# Altium PCB Copy of SixPak Ultra.PcbDoc (part 2 of 2)
Units mm, origin at the board's own origin, x right, y up, seen from the top; angles counter-clockwise.
Board outline 332.63 x 105.91 mm, 4 copper layers (Top Copper, Signal Layer 1, Signal Layer 2, Bottom Copper), stack 1.17 mm thick; 206 components, 300 nets, 1466 pads, 0 vias.
Unrouted connection lines stored in the file: 997.
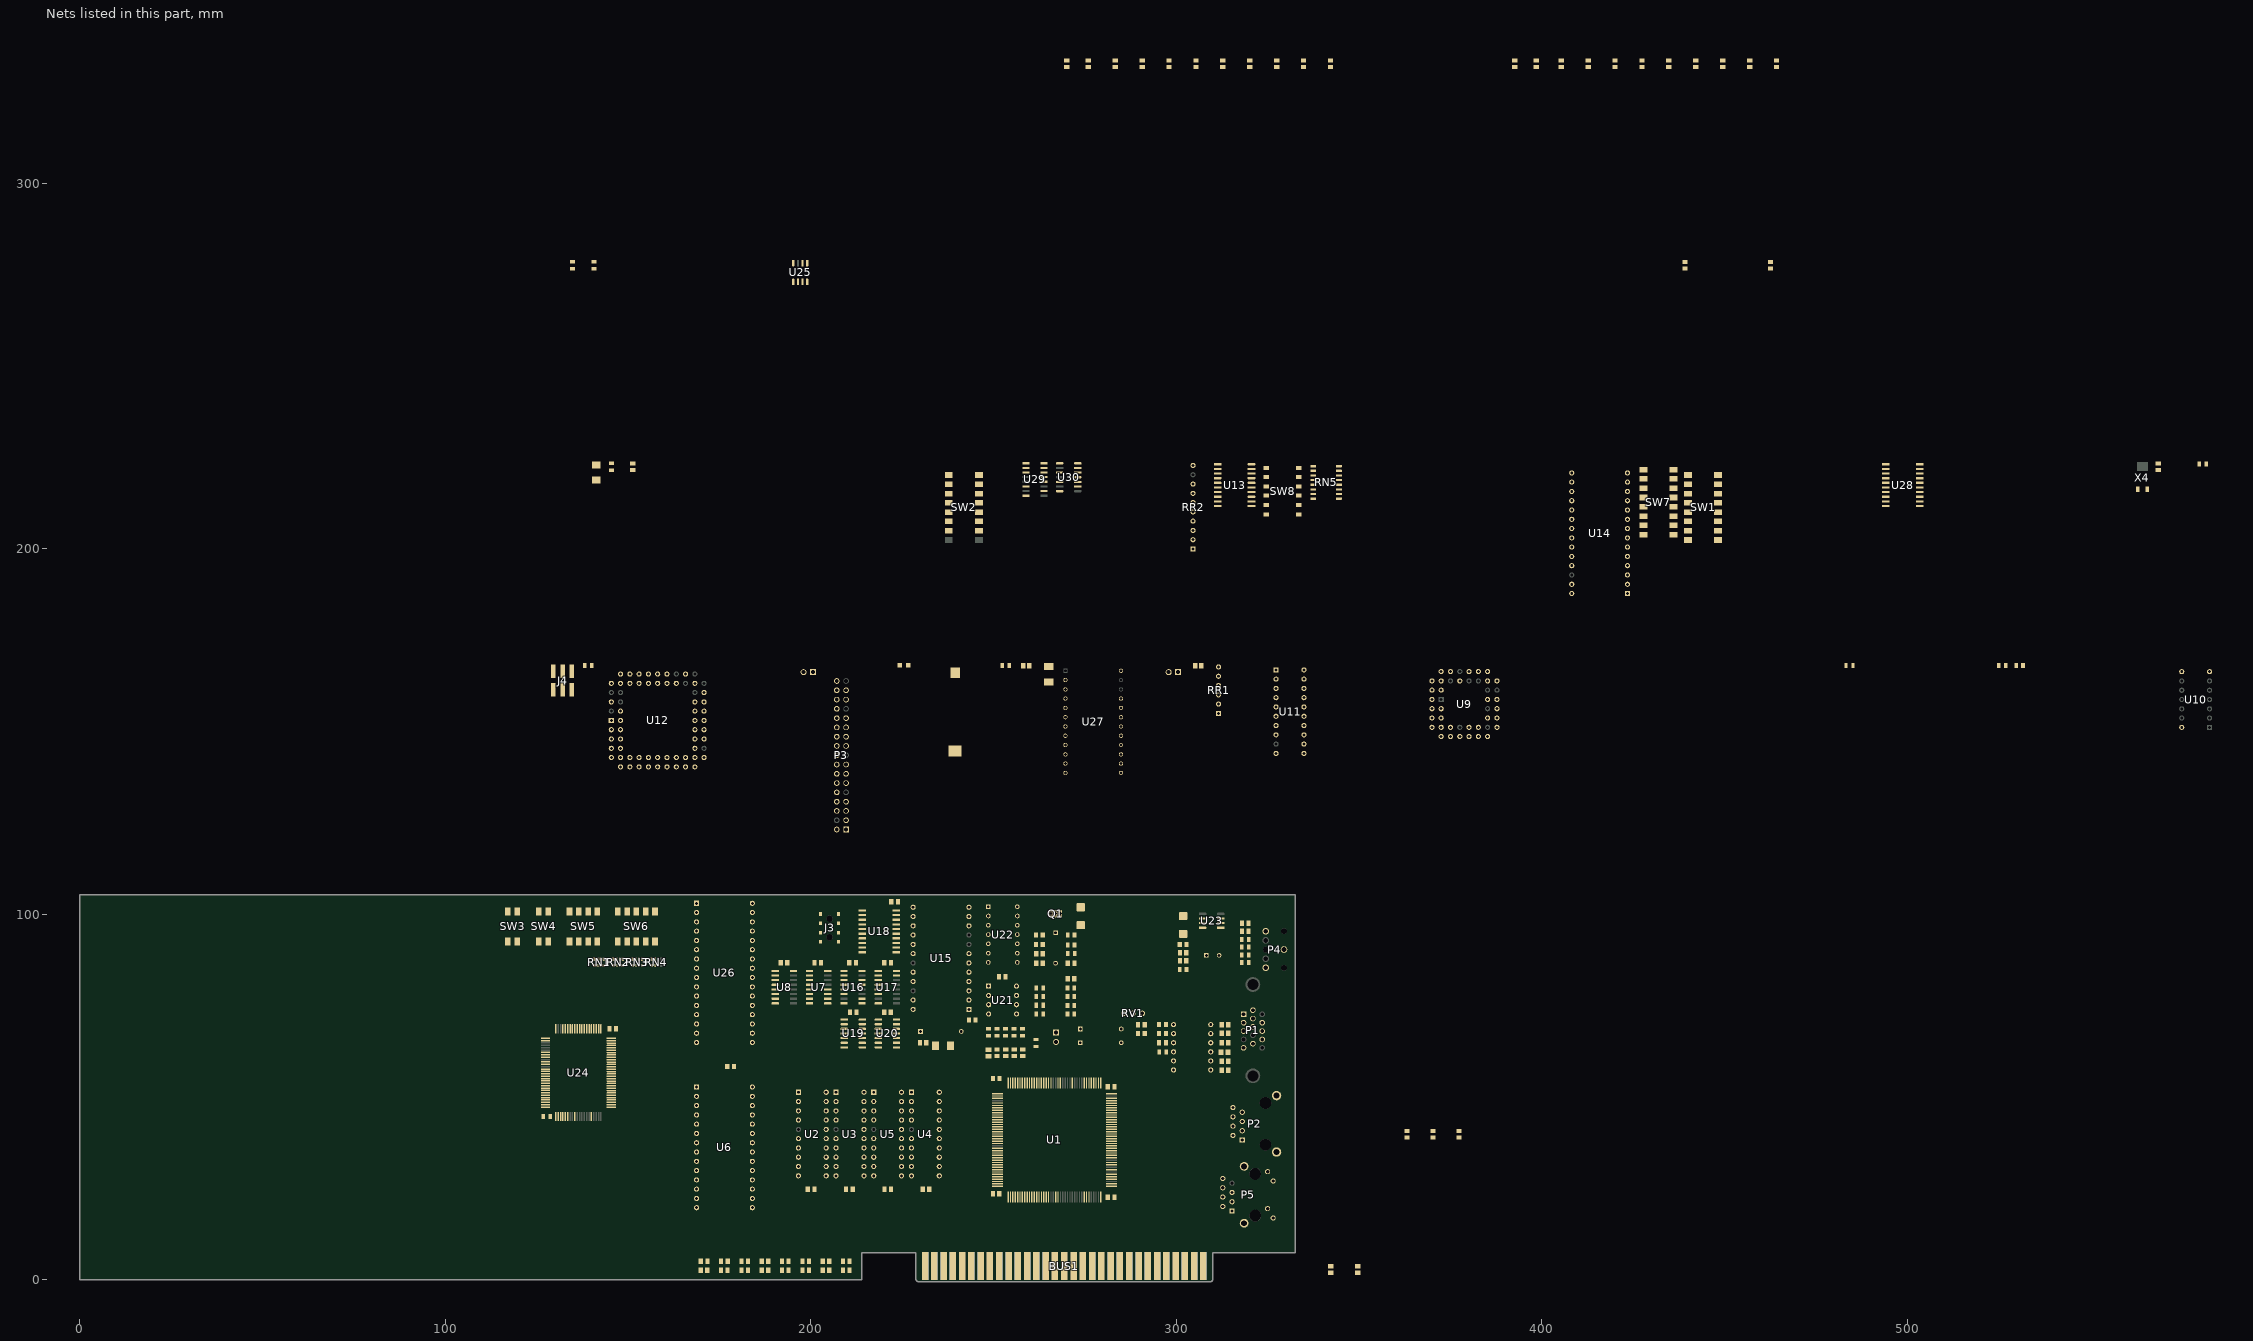
[diagram p2: the nets of this part, all layers, seen from the top]

## Part data
BT1: "Battery Holder (Open) Coin, 20.0mm 1 Cell SMD (SMT) Tab", Package=None, Availability=Unavailable, MF="{'manufacturer': u'Harwin Inc.'}", MP=S8421-45R, Price=None
C1 C2 C3 C4 C5 C6 C7 C8 C12 C14 C40 C48 C50 CD1 CD2 CD3 CD4 CD5 CD6 CD7 CD8 CD9 CD10 CD11 CD12 CD13 CD14 CD15 CD16 CD17 CD18 CD19 CD20 CD21 CD22 CD23 CD24 CD25 CD27 CD28 CD29 CD30 CD31 CD32 CD33 CD34 CD35 CD36 CD37 CD38 CD39 CD40 CD41: library part TAJR104K035RNJ, "0.1ÂµF Molded Tantalum Capacitors 35V 0805 _2012 Metric_ 29Ohm", Package="0805 AVX", Availability=Unavailable, MF=AVX, MP=TAJR104K035RNJ, Price=None, SnapEDA_Link=https://www.snapeda.com/parts/TAJR104K035RNJ/AVX%20/%20Kyocera/view-part/1689905/?ref=snap
C9 C10 C11 C13 C31 C49 C51 C52 C53 CD42 CD43 CD44: library part TACR106K016XTA, "Cap Tant Solid 10uF 16V R CASE 10% (2 X 1.35 X 1.35mm) SMD 2012-15 5 Ohm 125ÂÂŽ T/R", Package=None, Availability=Unavailable, MP=TACR106K016XTA, Price=None
C15 C16: library part CGA4J2X8R1H104K125AA, "0.1 ÂµF Â±10% 50V Ceramic Capacitor X8R 0805 (2012 Metric)", Package="2012 TDK", Check_prices=https://www.snapeda.com/parts/CGA4J2X8R1H104K125AA/TDK/view-part/?ref=eda, Digi-Key_Part_Number=445-5909-2-ND, MF=TDK, MP=CGA4J2X8R1H104K125AA, Purchase-URL=https://pricing.snapeda.com/search/part/CGA4J2X8R1H104K125AA/?ref=eda, SnapEDA_Link=https://www.snapeda.com/parts/CGA4J2X8R1H104K125AA/TDK/view-part/?ref=snap
C17: library part C0805C101J5RAC7800, Package=None, Availability=Unavailable, MP=C0805C101J5RAC7800, Price=None
C18 C19 C20 C21 C22 C23 C24 C26 C27: library part 08055A470JAT2A, "Capacitor: ceramic; 47pF; 50V; C0G; Â±5%; SMD; Case (inch):0805", Package=None, Availability=Unavailable, MP=08055A470JAT2A, Price=None
C25: library part CC0805KFX7R8BB105, "1ÂµF Â±10% 25V Ceramic Capacitor X7R 0805 (2012 Metric)", Package="0805 Yageo", Arrow_Electronics-Purchase-URL=https://snapeda.com/shop?store=Arrow+Electronics&id=1817011, Availability=Good, BuyPart=https://www.snapeda.com/parts/CC0805KFX7R8BB105/Yageo/view-part/1817011/?ref=eda, MF=Yageo, Mouser-Purchase-URL=https://snapeda.com/shop?store=Mouser&id=1817011, MP=CC0805KFX7R8BB105, Price=None, SnapEDA_Link=https://www.snapeda.com/parts/CC0805KFX7R8BB105/Yageo/view-part/1817011/?ref=snap
C28 C29: library part CMP-2007-01412-1, Manufacturer=Vitramon, Part Number=VJ0805A220KXJPW1BC
C30 C32 C33 C34 C35: library part C0805C472J2GAC7800, Package=None, Availability=Unavailable, MP=C0805C472J2GAC7800, Price=None
C36: library part TACR475M020XTA, "4.7uF SMD Solid MnO2 Tantalum Electrolytic Capacitor, 20 V dc +/-20%, TAC Series", Package=None, Availability=Unavailable, MP=TACR475M020XTA, Price=None
C37 C41: library part TAJC106J016RNJ, "10ÂµF Molded Tantalum Capacitors 16V 2312 (6032 Metric) 2Ohm", Package="2312 AVX", Availability=Bad, Check_prices=https://www.snapeda.com/parts/TAJC106J016RNJ/AVX/view-part/1684768/?ref=eda, MF=AVX, MP=TAJC106J016RNJ, Price=None, Purchase-URL=https://pricing.snapeda.com/search/part/TAJC106J016RNJ/?ref=eda, SnapEDA_Link=https://www.snapeda.com/parts/TAJC106J016RNJ/AVX/view-part/1684768/?ref=snap
C38: library part 0805YC102JAT2A, "CAP CER 1000PF 16V 5% X7R 0805", Package=None, Availability=Unavailable, MP=0805YC102JAT2A, Price=None
C39: library part C0805C271F5GACTU, "CAP, MLCC, C0G, 270PF, 50V, 0805", Package=None, Availability=Unavailable, MP=C0805C271F5GACTU, Price=None
C42: library part CGA4C2C0G1H472J060AA, "4700 pF Â±5% 50V Ceramic Capacitor C0G, NP0 0805 (2012 Metric)", Package="2012 TDK", Availability="In Stock", Check_prices=https://www.snapeda.com/parts/CGA4C2C0G1H472J060AA/TDK/view-part/?ref=eda, MF=TDK, MP=CGA4C2C0G1H472J060AA, Price=None, Purchase-URL=https://pricing.snapeda.com/search/part/CGA4C2C0G1H472J060AA/?ref=eda, SnapEDA_Link=https://www.snapeda.com/parts/CGA4C2C0G1H472J060AA/TDK/view-part/?ref=snap
C43: library part ECA1CM471, "470F 16V Aluminum Electrolytic Capacitors Radial, Can 2000 Hrs @ 85C", Package="RADIAL-2 Panasonic", Availability="No availability data", Check_prices=https://www.snapeda.com/parts/ECA1CM471/Panasonic/view-part/5788233/?ref=eda, MF=Panasonic, MP=ECA1CM471, Price=None, SnapEDA_Link=https://www.snapeda.com/parts/ECA1CM471/Panasonic/view-part/5788233/?ref=snap
C44 C45: library part C0805C100K4HACAUTO, Package=None, Availability=Unavailable, MP=C0805C100K4HACAUTO, Price=None
C46 C47: library part C0805C103J4RAC7800, Package=None, Availability=Unavailable, MP=C0805C103J4RAC7800, Price=None
D1: "Small Signal Fast Switching Diodes", Package=None, Availability=Unavailable, MP=1N4148, Price=None
J1 J2 J5: "Header, Friction Lock; MTA-100; 2; 250 VAC; Polyester; Tin; Copper Alloy; Tin", Package=None, Centerline_Pitch="2.54 mm[.1 in]", Digi-Key_Part_Number=A1911-ND, Digi-Key_Purchase_URL=https://www.digikey.com/product-detail/en/te-connectivity-amp-connectors/640452-2/A1911-ND/108973?utm_source=snapeda&utm_medium=aggregator&utm_campaign=symbol, MF="TE Connectivity", MP=640452-2, Number_of_Positions=2, Product_Type=Connector, SnapEDA_Link=https://www.snapeda.com/parts/640452-2/TE%20Connectivity%20AMP%20Connectors/view-part/2877927/?ref=snap, TE_purchase_URL=https://www.te.com/usa-en/product-640452-2.html?te_bu=Cor&te_type=disp&te_campaign=seda_glo_cor-seda-global-disp-prtnr-fy19-seda-model-bom-cta_sma-317_1&elqCampaignId=32493
J3: library part SAMTEC-TSM-104-01-X-DV-AJ, Package=SAMTEC-TSM-104-01-X-DV-A, DeviceName=J, DeviceSetName=SAMTEC-TSM-104-01-X-DV-A, GateName_1=A, LibraryName=SAMTEC-TSM-104-01-X-DV-A, SymbolName_1=SAMTEC-TSM-104-01-X-DV-AA
J4: library part TSM-103-01-T-DV, Package=None, Availability=Unavailable, MF=Samtec, MP=TSM-103-01-T-DV, Price=None
L1 L2 L3: library part 78F5R6J-RC, "No Description Available", Mfr_Name="Bourns Electronics", Copyright="Copyright (C) 2022 Ultra Librarian. All rights reserved.", Digi-Key_Part_Number_1=78F5R6J-RC-ND, Manufacturer_Part_Number=78F5R6J-RC, RefDes=RefDes, Type=DEV
P1: library part DE15
P2: "Conn Mod Jack 8p8c r/a Shielded", Package=None, Availability=Unavailable, MF="{'manufacturer': u'Assmann WSW'}", MP=A-2004-2-4-LP/S-R, Price=None
P3: library part CONN_17X2
P4: library part CONN_5
P5: "1 Port RJ45 Magjack Connector Through Hole 10/100 Base-T, AutoMDIX", Package=None, Digi-Key_Part_Number=RJMG1BD3B8K1ANR-ND, Digi-Key_Purchase_URL=https://www.digikey.com/product-detail/en/amphenol-icc-commercial-products/RJMG1BD3B8K1ANR/RJMG1BD3B8K1ANR-ND/5359794?utm_source=snapeda&utm_medium=aggregator&utm_campaign=symbol, MF="Amphenol ICC", MP=RJMG1BD3B8K1ANR, SnapEDA_Link=https://www.snapeda.com/parts/RJMG1BD3B8K1ANR/Amphenol%20FCI/view-part/1683132/?ref=snap
Q1 SW8 U7 U8 U13 U16 U17 U27 U28 U29 U30 X1: Package=None, Availability=Unavailable, Price=None
  Q1: MP=2N3904
  SW8: MF="{'manufacturer': u'CUI Devices'}", MP=DS04-254-2-06BK-SMT-TR
  U7 U8 U16 U17: MP=SN74ALS138ADR
  U13: MP=SN74LS688DW
  U27: MF="{'manufacturer': u'Maxim Integrated'}", MP=DS12885
  U28: MF="{'manufacturer': u'Texas Instruments'}", MP=SN74LS688DW
  U29: MF="{'manufacturer': u'Texas Instruments'}", MP=SN74HCT139D
  U30: MF="{'manufacturer': u'Texas Instruments'}", MP=CD74HC04M
  X1: MP=ABM3-40.000MHZ-B2-T
R1: library part ERJ6ENF1000V, Package=None, Availability=Unavailable, MP=ERJ6ENF1000V, Price=None
R2: library part AC0805FR-101KL, "1 kOhms Â±1% 0.125W, 1/8W Chip Resistor 0805 (2012 Metric) Automotive AEC-Q200 Thick Film", Package=None, Check_prices=https://www.snapeda.com/parts/AC0805FR-101KL/Yageo/view-part/?ref=eda, Digi-Key_Part_Number=13-AC0805FR-101KLTR-ND, MF=YAGEO, MP=AC0805FR-101KL, Purchase-URL=https://pricing.snapeda.com/search/part/AC0805FR-101KL/?ref=eda, SnapEDA_Link=https://www.snapeda.com/parts/AC0805FR-101KL/Yageo/view-part/?ref=snap
R3 R7 R8 R9: library part ERJ-6GEYJ151V, "Res Thick Film 0805 150 Ohm 5% 0.125W(1/8W) Â}200ppm/ÂÂŽ Molded SMD Automotive T/R", Package=None, Availability=Unavailable, MP=ERJ-6GEYJ151V, Price=None
R4 R5: library part RMCF0805JT33R0, Package=None, Availability=Unavailable, MP=RMCF0805JT33R0, Price=None
R6 R10 R11 R12 R13 R14 R15 R16: library part RC0805FR-074K7L, "4.7 kOhms Â±1% 0.125W, 1/8W Chip Resistor 0805 _2012 Metric_ Moisture Resistant Thick Film", Package="2012 Rohm Semiconductor", Digi-Key_Part_Number=311-4.70KCRCT-ND, Digi-Key_Purchase_URL=https://www.digikey.com.eg/product-detail/en/yageo/RC0805FR-074K7L/311-4.70KCRCT-ND/730876?utm_source=snapeda&utm_medium=aggregator&utm_campaign=symbol, MF=Yageo, MP=RC0805FR-074K7L, SnapEDA_Link=https://www.snapeda.com/parts/RC0805FR-074K7L/Yageo/view-part/523399/?ref=snap
R17: library part AC0805JR-072K2L, "AC0805 2,2K 5% 0,125W AUTOMO", Package=None, Availability=Unavailable, MP=AC0805JR-072K2L, Price=None
R18 R19 R22 R23 R26 R27: library part ERJ-PB6B2201V, Package=None, Availability=Unavailable, MP=ERJ-PB6B2201V, Price=None
R20: library part ERJ-PB6B1202V, Package=None, Availability=Unavailable, MP=ERJ-PB6B1202V, Price=None
R21 R25 R28 R31: library part ERJ-PB6B1002V, "10 kOhms Â±0.1% 0.25W, 1/4W Chip Resistor 0805 (2012 Metric) Automotive AEC-Q200, Pulse Withstanding Thick Film", Package="2012 Panasonic Electronic Components", Check_prices=https://www.snapeda.com/parts/ERJ-PB6B1002V/Panasonic%20Electronic%20Components/view-part/3737287/?ref=eda, Digi-Key_Part_Number=P20708CT-ND, MF="Panasonic Electronic", MP=ERJ-PB6B1002V, SnapEDA_Link=https://www.snapeda.com/parts/ERJ-PB6B1002V/Panasonic%20Electronic%20Components/view-part/3737287/?ref=snap
R24: library part ERJ-PB6B1501V, "Res Thick Film 0805 1.5K Ohm 0.1% 0.25W(1/4W) Â±50ppm/C Pad SMD Automotive T/R", Package=None, Availability=Unavailable, MP=ERJ-PB6B1501V, Price=None
R29 R30 R32 R33 R34: library part ERJ-PB6B8201V, Package=None, Availability=Unavailable, MP=ERJ-PB6B8201V, Price=None
R35 R36: library part ERJ-PB6B4700V, Package=None, Availability=Unavailable, MP=ERJ-PB6B4700V, Price=None
R37: library part RK73H2ARTTD2702F, "Res Thick Film 0805 27K Ohm 1% 0.25W(1/4W) Â±100ppm/Â°C Sulfur Resistant Pad SMD Automotive T/R", Package=None, Availability=Unavailable, MF="{'manufacturer': u'KOA Speer'}", MP=RK73H2ARTTD2702F, Price=None
RN1 RN2 RN3 RN4: library part EXB-38V103JV, "Res Thick Film Array 470 Ohm 5% ?200ppm/C ISOL Molded 8-Pin 1206(4 X 0603) Convex SMD Automotive T/R", Package=None, Availability=Unavailable, MF="{'manufacturer': u'Panasonic'}", MP=EXB-38V103JV, Price=None
RN5: library part 4816P-1-103LF, "Res Thick Film NET 68K Ohm 2% 1.28W Â±100ppm/C ISOL Molded 16-Pin SOM Gull Wing SMD Automotive T/R", Package=None, Availability=Unavailable, MF="{'manufacturer': u'Bourns'}", MP=4816P-1-103LF, Price=None
RR1: library part RR5
RR2: library part RR9
RV1: library part POT
SW1 SW2: "AD Series 8 Position SPST Extended Slide Non Sealed 2.54 mm Pitch SMT DIP Switch", Package="DIP-4 TE Connectivity", Availability=Unavailable, EU_RoHS_Compliance=Compliant, MF="TE Connectivity", MP=1-1825058-9, Price=None, SnapEDA_Link=https://www.snapeda.com/parts/1-1825058-9/TE%20Connectivity%20ALCOSWITCH%20Switches/view-part/52148/?ref=snap, TE_purchase_URL=https://www.te.com/usa-en/product-1-1825058-9.html?te_bu=Cor&te_type=disp&te_campaign=seda_glo_cor-seda-global-disp-prtnr-fy19-seda-model-bom-cta_sma-317_1&elqCampaignId=32493
SW3 SW4 SW5 SW6 SW7: "SPST Flush Slide Sealed 2.54 mm Pitch Surface Mount DIP Switch", Package=None, Availability=Unavailable, MF="{'manufacturer': u'TE Connectivity'}", Price=None
  SW3 SW4: MP=1825059-1
  SW5: MP=1-1825059-7
  SW6: MP=2-1825059-3
  SW7: MP=4-1825059-1
U10: library part OSC
U18: "Octal bus transceivers 20-SOIC 0 to 70", Package="SOIC-20 Texas Instruments", Check_prices=https://www.snapeda.com/parts/SN74LS245DW/Texas%20Instruments/view-part/564932/?ref=eda, Digi-Key_Part_Number=296-1214-2-ND, MF="Texas Instruments", MP=SN74LS245DW, Purchase-URL=https://pricing.snapeda.com/search/part/SN74LS245DW/?ref=eda, SnapEDA_Link=https://www.snapeda.com/parts/SN74LS245DW/Texas%20Instruments/view-part/564932/?ref=snap
U19: "6-ch, 4.75-V to 5.25-V bipolar inverters", Package="SOIC-14 Texas Instruments", Availability="In Stock", Check_prices=https://www.snapeda.com/parts/SN74LS04DR/Texas+Instruments/view-part/?ref=eda, MF="Texas Instruments", MP=SN74LS04DR, Price=None, Purchase-URL=https://pricing.snapeda.com/search/part/SN74LS04DR/?ref=eda, SnapEDA_Link=https://www.snapeda.com/parts/SN74LS04DR/Texas+Instruments/view-part/?ref=snap
U20: "Dual D-type pos.-edge-triggered flip-flops with preset and clear 14-SOIC 0 to 70", Package="SOIC-14 Texas Instruments", Availability=Good, Check_prices=https://www.snapeda.com/parts/SN74LS74AD/Texas%20Instruments/view-part/580890/?ref=eda, MF="Texas Instruments", MP=SN74LS74AD, Price=None, Purchase-URL=https://pricing.snapeda.com/search/part/SN74LS74AD/?ref=eda, SnapEDA_Link=https://www.snapeda.com/parts/SN74LS74AD/Texas%20Instruments/view-part/580890/?ref=snap
U22: "Quad general purpose 30V operational amplifier 14-PDIP 0 to 70", Package="PDIP-14 Texas Instruments", Availability=Good, Check_prices=https://www.snapeda.com/parts/RC4136N/Texas%20Instruments/view-part/568586/?ref=eda, MF="Texas Instruments", MP=RC4136N, Price=None, Purchase-URL=https://pricing.snapeda.com/search/part/RC4136N/?ref=eda, SnapEDA_Link=https://www.snapeda.com/parts/RC4136N/Texas%20Instruments/view-part/568586/?ref=snap
U23: "Wide Input Voltage Low Power Audio Amplifier with Internal Gain", Package="SOIC-8 Texas Instruments", Availability=Unavailable, MF="Texas Instruments", MP=LM386MX-1/NOPB, Price=None, SnapEDA_Link=https://www.snapeda.com/parts/LM386MX-1/NOPB/Texas%20Instruments/view-part/216475/?ref=snap, Texas_Instruments-Purchase-URL=https://snapeda.com/shop?store=Texas+Instruments&id=216475
U25: library part 93LCxxC
X2: "24 MHz Â±20ppm Crystal 18pF 50 Ohms 2-SMD, No Lead", Package="SMD-2 Abracon LLC", Check_prices=https://www.snapeda.com/parts/ABM7-24.000MHZ-D2Y-T/Abracon+LLC/view-part/?ref=eda, Digi-Key_Part_Number=535-9845-2-ND, MF="Abracon LLC", MP=ABM7-24.000MHZ-D2Y-T, Purchase-URL=https://pricing.snapeda.com/search/part/ABM7-24.000MHZ-D2Y-T/?ref=eda, SnapEDA_Link=https://www.snapeda.com/parts/ABM7-24.000MHZ-D2Y-T/Abracon+LLC/view-part/?ref=snap
X3: library part ABM3-20.000MHZ-B2-T, "20 MHz Â±20ppm Crystal 18pF 30 Ohms 2-SMD, No Lead", Package="SMD-2 Abracon", Availability="In Stock", Check_prices=https://www.snapeda.com/parts/ABM3-20.000MHZ-B2-T/Abracon+LLC/view-part/?ref=eda, MF=Abracon, MP=ABM3-20.000MHZ-B2-T, Price=None, Purchase-URL=https://pricing.snapeda.com/search/part/ABM3-20.000MHZ-B2-T/?ref=eda, SnapEDA_Link=https://www.snapeda.com/parts/ABM3-20.000MHZ-B2-T/Abracon+LLC/view-part/?ref=snap
X4: library part MS1V-T1K-32.768KHZ-7PF-20PPM-TA-QC-AU, "Tuning Fork Crystal 30 kHz â€“ 200 kHz", Package=None, Availability=Unavailable, MF="{'manufacturer': u'Micro Crystal'}", MP=MS1V-T1K-32.768KHZ-7PF-20PPM-TA-QC-AU, Price=None

## Nets (pads, with @x,y where several pads share a name; then routed paths per layer and width w, separated by ;. In a path a pad name is that pad's centre, name@x,y a point inside that pad or via, vN(x,y) a via of type N, cw(c..) or ccw(c..) an arc to the next point about the centre after c; other vN are vias at no path point)
+12: BUS1.9 C48.1 C49.1 C52.1 CD42.1 CD43.1 CD44.1 U11.1 U23.6
A0: BUS1.62 U1.135 U9.31 U12.7 U14.10 U15.4 U24.5 U26.12 U29.3 U29.13
A1: BUS1.61 U1.136 U6.10 U9.30 U12.8 U14.9 U17.1 U24.7 U26.11
A2: BUS1.60 U1.137 U6.9 U9.29 U12.10 U14.8 U17.2 U24.8 U26.10 U28.2
A3: BUS1.59 U1.138 U6.8 U7.3 U14.7 U17.6 U24.9 U26.9 U28.4
A4: BUS1.58 U1.139 U6.7 U7.2 U14.6 U16.1 U24.10 U26.8 U28.6
A5: BUS1.57 U1.140 U6.6 U7.6 U14.5 U17.3 U24.11 U26.7 U28.8
A6: BUS1.56 U1.141 U6.5 U8.1 U14.4 U17.5 U24.12 U26.6 U28.11
A7: BUS1.55 U1.142 U6.4 U8.2 U14.3 U16.2 U24.13 U26.5 U28.13
A8: BUS1.54 U1.144 U6.3 U7.1 U14.25 U16.3 U24.15 U26.27 U28.15
A9: BUS1.53 U1.145 U6.25 U8.3 U14.24 U16.6 U24.16 U26.26 U28.17
A10: BUS1.52 U1.146 U6.24 U14.21 U24.18 U26.23
A11: BUS1.51 U1.147 U6.21 U14.23 U24.19 U26.25
A12: BUS1.50 U1.148 U6.23 U14.2 U24.20 U26.4
A13: BUS1.49 U1.149 U6.2 U13.15 U24.21 U26.28
A14: BUS1.48 U1.150 U6.26 U13.13 U24.22
A15: BUS1.47 U1.151 U13.11 U24.23
A16: BUS1.46 U1.152 U13.8 U24.24
A17: BUS1.45 U1.113 U13.6 U24.25
A18: BUS1.44 U1.114 U13.4 U24.26
A19: BUS1.43 U1.115 U13.2 U24.27
AEN: BUS1.42 U7.4 U16.4 U24.34 U28.1
AGND: C11.2 C12.2 C13.2 C14.2 C31.2 C33.1 C34.1 C38.2 C39.2 C40.2 C41.2 D1.A P4.1 Q1.1 R21.2 R25.2 R28.2 R30.1 R31.1 RV1.1 U1.1 U1.126 U21.6 U23.4
AMP_OUT: C42.1 C43.P U23.5
AUI: RN4.1 U24.64
AVDD1: C11.1 C12.1 C16.2 L1.1 U1.124
AVDD2: C13.1 C14.1 L2.1 U1.6 U1.13
B: FB3.1 R9.2 U1.2
BA14: U24.74 U26.29
BA15: U24.73 U26.3
BA16: RN4.2 U24.72 U26.2
BA17: RN3.4 U24.71 U26.30
BA18: RN3.3 U24.69 U26.1
BA19: RN3.2 U24.68
BA20: RN3.1 U24.67
BA21: RN1.2 U24.66
BD0: RN2.4 U24.85 U26.13
BD1: RN2.3 U24.84 U26.14
BD2: RN2.2 U24.82 U26.15
BD3: RN2.1 U24.81 U26.17
BD4: U24.80 U26.18
BD5: RN1.4 U24.79 U25.2 U26.19
BD6: RN1.3 U24.78 U25.3 U26.20
BD7: U24.77 U25.4 U26.21
CTS: P2.1 U11.7
D0: BUS1.40 U1.25 U9.2 U12.11 U14.11 U18.2 U24.36 U27.4
D1: BUS1.39 U1.26 U9.3 U12.13 U14.12 U18.3 U24.37 U27.5
D2: BUS1.38 U1.27 U9.4 U12.14 U14.13 U18.4 U24.38 U27.6
D3: BUS1.37 U1.28 U9.5 U12.15 U14.15 U18.5 U24.39 U27.7
D4: BUS1.36 U1.29 U9.6 U12.17 U14.16 U18.6 U24.40 U27.8
D5: BUS1.35 U1.30 U9.7 U12.19 U14.17 U18.7 U24.41 U27.9
D6: BUS1.34 U1.31 U9.8 U12.20 U14.18 U18.8 U24.42 U27.10
D7: BUS1.33 U1.32 U9.9 U12.22 U14.19 U18.9 U24.43 U27.11
DAC_CLK: U15.23 U21.5
DAC_DATA: U15.21 U21.4
DAC_SYNC: U15.20 U21.3
DB0: U15.10 U18.18
DB1: U15.11 U18.17
DB2: U15.13 U18.16
DB3: U15.14 U18.15
DB4: U15.15 U18.14
DB5: U15.16 U18.13
DB6: U15.17 U18.12
DB7: U15.18 U18.11
DCD: P2.4 U11.2
DENSL: P3.2 U12.49
DIR: P3.18 U12.56
DRQ2: BUS1.6 U12.24
DSA: P3.14 U12.58
DSB: P3.12 U12.62
DSKCG: P3.34 RR1.6 U12.31
DSR: P2.2 U11.3
DTR: P2.7 U11.8
EECS: U24.76 U25.1
EXPROMRDY: RR2.10 U14.1
FILTER_OUT: C35.2 C36.1 R24.2 U22.12
G: FB2.1 R8.2 U1.3
GND: BT1.NEG BUS1.1 BUS1.10 BUS1.31 C1.2 C2.2 C3.2 C4.2 C5.2 C6.2 C7.2 C8.2 C9.2 C10.2 C15.2 C17.2 C18.2 C19.2 C20.2 C21.2 C22.2 C23.2 C24.2 C25.2 C26.2 C27.2 C28.1 C29.1 C44.2 C45.2 C46.2 C47.2 C48.2 C49.2 C50.1 C51.1 C52.2 C53.1 CD1.2 CD2.2 CD3.2 CD4.2 CD5.2 CD6.2 CD7.2 CD8.2 CD9.2 CD10.2 CD11.2 CD12.2 CD13.2 CD14.2 CD15.2 CD16.2 CD17.2 CD18.2 CD19.2 CD20.2 CD21.2 CD22.2 CD23.2 CD24.2 CD25.2 CD27.2 CD28.2 CD29.2 CD30.2 CD31.2 CD32.2 CD33.2 CD34.2 CD35.2 CD36.2 CD37.2 CD38.2 CD39.2 CD40.2 CD41.2 CD42.2 CD43.2 CD44.2 J1.1 J5.2 P1.5 P1.6 P1.7 P1.8 P1.10 P2.5 P2.S1 P2.S2 P3.1 P3.5 P3.7 P3.11 P3.13 P3.15 P3.19 P3.21 P3.23 P3.25 P3.29 P3.31 P5.1 P5.2 P5.R8 R3.2 R7.1 R8.1 R9.1 R11.2 R12.2 R13.2 R14.2 R15.2 R37.1 RN4.8 RN5.1 RN5.2 RN5.3 RN5.4 RN5.5 RN5.6 RN5.7 RN5.8 SW2.3 SW2.4 SW2.5 SW2.6 SW2.7 U1.7 U1.23 U1.41 U1.42 U1.49 U1.50 U1.58 U1.79 U1.80 U1.101 U1.121 U1.122 U1.128 U1.143 U1.160 U2.16 U2.20 U3.16 U3.20 U4.16 U4.20 U5.16 U5.20 U6.14 U6.20 U7.8 U8.4 U8.5 U8.8 U9.21 U9.22 U9.25 U9.28 U10.7 U11.20 U12.9 U12.12 U12.16 U12.21 U12.30 U12.35 U12.36 U12.45 U12.50 U12.54 U12.59 U12.65 U13.1 U13.10 U13.17 U13.18 U14.14 U15.12 U16.8 U17.4 U17.8 U18.10 U19.7 U20.7 U24.14 U24.28 U24.44 U24.52 U24.83 U24.86 U25.5 U26.16 U27.12 U27.13 U27.16 U28.10 U29.8 U30.1 U30.3 U30.5 U30.7 U30.9
HDSEL: P3.32 U12.51
HSYNC: FB5.2 U1.48
INDEX: P3.8 RR1.2 U12.26
IOCHRDY: BUS1.41 U1.157 U24.35
IRQ3: BUS1.25 J4.01 SW1.1 SW8.1B U24.3
IRQ4: BUS1.24 SW1.2 SW8.2B U24.2
IRQ5: BUS1.23 J4.03 SW1.3 SW8.3B U24.1
IRQ6: BUS1.22 SW8.4B U12.23
IRQ7: BUS1.21 SW1.4 SW8.5B
IRQ9: BUS1.4 J4.05 SW8.6B U24.4
JP: RN1.1 U24.65
LED_CRS: R36.2 U24.62
LED_LINK: R35.2 U24.61
MAA0: U1.52 U2.6 U3.6
MAA1: U1.53 U2.7 U3.7
MAA2: U1.54 U2.8 U3.8
MAA3: U1.55 U2.9 U3.9
MAA4: U1.56 U2.11 U3.11
MAA5: U1.57 U2.12 U3.12
MAA6: U1.59 U2.13 U3.13
MAA7: U1.60 U2.14 U3.14
MAA8: U1.61 U2.15 U3.15
MAB0: U1.73 U4.6 U5.6
MAB1: U1.74 U4.7 U5.7
MAB2: U1.75 U4.8 U5.8
MAB3: U1.76 U4.9 U5.9
MAB4: U1.77 U4.11 U5.11
MAB5: U1.78 U4.12 U5.12
MAB6: U1.82 U4.13 U5.13
MAB7: U1.83 U4.14 U5.14
MAB8: U1.84 U4.15 U5.15
MCLK: U15.24 U20.9
MD0: U1.64 U2.1
MD1: U1.65 U2.2
MD2: R16.1 U1.66 U2.18
MD3: R12.1 U1.67 U2.19
MD4: U1.68 U3.1
MD5: U1.70 U3.2
MD6: U1.71 U3.18
MD7: R11.1 U1.72 U3.19
MD16: U1.89 U4.1
MD17: U1.90 U4.2
MD18: U1.91 U4.18
MD19: U1.92 U4.19
MD20: U1.93 U5.1
MD21: U1.94 U5.2
MD22: U1.95 U5.18
MD23: U1.96 U5.19
MEA: P3.10 U12.57
MEB: P3.16 U12.61
MONITOR: FB4.2 R10.1 U1.46
nBCS: U24.75 U26.22
nCAS: C20.1 R5.2 U2.17 U3.17 U4.17 U5.17
nCTS: U9.40 U11.14
nDACK2: BUS1.26 U12.3
nDCD: U9.42 U11.19
nDEC1: U28.19 U29.1 U29.15
nDSR: U9.41 U11.18
nDTR: U9.37 U11.13
NetC15_1: C15.1 L3.1
NetC16_1: C16.1 U1.125
NetC17_1: C17.1 R1.1 U1.154
NetC19_1: C19.1 R2.2 U1.5
NetC22_1: C22.1 FB1.2 P1.1
NetC23_1: C23.1 FB2.2 P1.2
NetC24_1: C24.1 FB3.2 P1.3
NetC25_1: C25.1 FB4.1 P1.12
NetC26_1: C26.1 FB5.1 P1.13
NetC27_1: C27.1 FB6.1 P1.14
NetC28_2: C28.2 U12.33 X2.2
NetC29_2: C29.2 U12.34 X2.1
NetC30_1: C30.1 U12.37
NetC30_2: C30.2 U12.38
NetC31_1: C31.1 U21.7 U22.2
NetC32_1: C32.1 R18.2 R19.1
NetC32_2: C32.2 R20.2 R22.1 U22.10
NetC33_2: C33.2 R19.2 U22.9
NetC34_2: C34.2 R23.2 U22.13
NetC35_1: C35.1 R22.2 R23.1
NetC36_2: C36.2 R27.1 R28.1
NetC37_2: C37.2 D1.C R26.1
NetC38_1: C38.1 Q1.3 R27.2 R29.1
NetC39_1: C39.1 R29.2 RV1.3
NetC40_1: C40.1 U23.2
NetC41_1: C41.1 U23.7
NetC42_2: C42.2 R30.2
NetC43_N: C43.N R31.2 R32.1 R33.1
NetC44_1: C44.1 R34.2 U24.50 X3.1
NetC45_1: C45.1 R34.1 U24.51 X3.2
NetC46_1: C46.1 P5.R5
NetC47_1: C47.1 P5.R4
NetJ1_2: J1.2 R16.2
NetJ2_2: J2.2 P3.3
NetJ3_1: J3.1 U16.14
NetJ3_3: J3.3 U16.13
NetJ3_5: J3.5 U16.10
NetJ5_1: J5.1 U27.21
NetL3_2: L3.2 U1.131 X1.2
NetP3_6: P3.6 U12.28
NetP4_2: P4.2 R33.2
NetP4_5: P4.5 R32.2
NetP5_L2: P5.L2 R36.1
NetP5_L3: P5.L3 R35.1
NetQ1_2: Q1.2 R26.2
NetR3_1: R3.1 U1.18
NetR4_1: R4.1 U1.86
NetR5_1: R5.1 U1.85
NetR6_2: R6.2 U1.102
NetR18_1: R18.1 U22.4 U22.6
NetR20_1: R20.1 R21.1 U22.8
NetR24_1: R24.1 R25.1 U22.14
NetRN1_5: RN1.5 SW4.2
NetRN1_6: RN1.6 SW4.1
NetRN1_7: RN1.7 SW3.2
NetRN1_8: RN1.8 SW3.1
NetRN2_5: RN2.5 SW5.4
NetRN2_6: RN2.6 SW5.3
NetRN2_7: RN2.7 SW5.2
NetRN2_8: RN2.8 SW5.1
NetRN3_5: RN3.5 SW6.4
NetRN3_6: RN3.6 SW6.3
NetRN3_7: RN3.7 SW6.2
NetRN3_8: RN3.8 SW6.1
NetRN4_7: RN4.7 SW6.5
NetRN5_9: RN5.9 SW7.16 U28.3
NetRN5_10: RN5.10 SW7.15 U28.5
NetRN5_11: RN5.11 SW7.14 U28.7
NetRN5_12: RN5.12 SW7.13 U28.9
NetRN5_13: RN5.13 SW7.12 U28.12
NetRN5_14: RN5.14 SW7.11 U28.14
NetRN5_15: RN5.15 SW7.10 U28.16
NetRN5_16: RN5.16 SW7.9 U28.18
NetRR2_4: RR2.4 SW2.3.1 U13.7
NetRR2_5: RR2.5 SW2.4.1 U13.9
NetRR2_6: RR2.6 SW2.5.1 U13.12
NetRR2_7: RR2.7 SW2.6.1 U13.14
NetRR2_8: RR2.8 SW2.7.1 U13.16
NetRV1_2: RV1.2 U23.3
NetSW1_5: SW1.5 U7.11
NetSW1_6: SW1.6 U7.10
NetSW1_7: SW1.7 U7.9
NetSW1_8: SW1.8 U7.7
NetU1_133: U1.133 X1.1
NetU7_5: U7.5 U8.7
NetU9_10: U9.10 U9.17
NetU9_18: U9.18 U10.8
NetU16_5: U16.5 U17.15
NetU19_4: U19.4 U19.11
NetU19_6: U19.6 U19.9
NetU20_2: U20.2 U20.6
NetU20_5: U20.5 U20.11
NetU20_8: U20.8 U20.12
NetU21_2: U21.2 U22.5
NetU21_8: U21.8 U22.1 U22.3
NetU27_2: U27.2 X4.1
NetU27_3: U27.3 X4.2
NetU29_12: U29.12 U30.11
nEXPROMCS: RR2.2 SW2.1.1 U14.20
nEXPROMCS_in: SW2.1 U13.19
nFDC_CS: U7.12 U12.6
nIOCHCK: BUS1.32 U1.24
nIOCS16: R37.2 U24.96
nIOR: BUS1.14 U1.153 U9.24 U12.4 U19.3 U24.29 U29.2
nIOW: BUS1.13 R1.2 U9.20 U12.5 U19.5 U24.30 U29.14
nMEMR: BUS1.12 C18.1 U1.155 U14.22
nMEMW: BUS1.11 SW2.2 U1.156
nOPL_CS: J3.2 J3.4 J3.6 J3.7 J3.8 U15.7 U16.9 U18.19
nOPL_IRQ: R17.2 U15.2 U19.1
nOPL_RD: U15.6 U18.1 U19.10
nOPL_WR: U15.5 U19.8
nRAS: C21.1 R4.2 U2.4 U3.4 U4.4 U5.4
nREFRESH: BUS1.19 U1.158
nRESET: U15.3 U19.12
nRI: U9.43 U11.12
nROMCS: U1.45 U6.22
nROMW: RR2.3 SW2.2.1 U14.27
nRTC_RD: U27.17 U29.6
nRTC_WR: U27.15 U29.10
nRTCIRQ: U27.19 U30.13
nRTS: U9.36 U11.16
nSIN: U9.11 U11.17
nSMEMR: U24.31 U26.24
nSMEMW: U24.32 U26.31
nSOUT: U9.13 U11.15
nUART_CS: SW1.5.1 SW1.6.1 SW1.7.1 SW1.8.1 U9.16
nWE0: U1.88 U2.3 U3.3
nWE2: U1.87 U4.3 U5.3
OPL_IRQ: J4.02 J4.04 J4.06 U19.2
OSC: BUS1.30 U1.98 U20.3
R: FB1.1 R7.2 U1.4
RDATA: P3.30 RR1.5 U12.41
RESET: BUS1.2 R2.1 U19.13 U24.33
RESETDRV: U9.39 U12.32
RMD0: U1.43 U6.11
RMD1: R13.1 U1.39 U6.12
RMD2: U1.38 U6.13
RMD3: U1.37 U6.15
RMD4: R14.1 U1.36 U6.16
RMD5: U1.35 U6.17
RMD6: R15.1 U1.34 U6.18
RMD7: U1.33 U6.19
ROMA0: U1.97 U6.27
RTC_ALE: U27.14 U30.10
RTC_IRQ: SW8.1A SW8.2A SW8.3A SW8.4A SW8.5A SW8.6A U30.12
RTS: P2.8 U11.5
RX: P2.3 U11.4
STEP: P3.20 U12.55
TC: BUS1.27 U12.25
TP_RX+: P5.R3 U24.59
TP_RX-: P5.R6 U24.58
TP_TX+: P5.R1 U24.45
TP_TX-: P5.R2 U24.46
TRK00: P3.26 RR1.3 U12.2
TX: P2.6 U11.6
UART_IRQ: SW1.1.1 SW1.2.1 SW1.3.1 SW1.4.1 U9.33
VBAT: BT1.POS U27.20
VCC: BUS1.3 BUS1.29 C1.1 C2.1 C3.1 C4.1 C5.1 C6.1 C7.1 C8.1 C9.1 C10.1 C37.1 CD1.1 CD2.1 CD3.1 CD4.1 CD5.1 CD6.1 CD7.1 CD8.1 CD9.1 CD10.1 CD11.1 CD12.1 CD13.1 CD14.1 CD15.1 CD16.1 CD17.1 CD18.1 CD19.1 CD20.1 CD21.1 CD22.1 CD23.1 CD24.1 CD25.1 CD27.1 CD28.1 CD29.1 CD30.1 CD31.1 CD32.1 CD33.1 CD34.1 CD35.1 CD36.1 CD37.1 CD38.1 CD39.1 CD40.1 CD41.1 J2.1 L1.2 L2.2 P5.L1 P5.L4 R6.1 R10.2 R17.1 RR1.1 RR2.1 SW3.3 SW3.4 SW4.3 SW4.4 SW5.5 SW5.6 SW5.7 SW5.8 SW6.6 SW6.7 SW6.8 SW6.9 SW6.10 SW7.1 SW7.2 SW7.3 SW7.4 SW7.5 SW7.6 SW7.7 SW7.8 U1.8 U1.19 U1.22 U1.40 U1.51 U1.62 U1.69 U1.81 U1.120 U1.130 U1.134 U2.10 U3.10 U4.10 U5.10 U6.1 U6.28 U7.16 U8.6 U8.16 U9.14 U9.15 U9.44 U10.14 U11.11 U12.18 U12.27 U12.39 U12.40 U12.46 U12.60 U12.68 U13.3 U13.5 U13.20 U14.28 U15.1 U16.16 U17.16 U18.20 U19.14 U20.1 U20.4 U20.10 U20.13 U20.14 U21.1 U22.11 U24.6 U24.17 U24.47 U24.57 U24.70 U24.89 U25.6 U25.8 U26.32 U27.18 U27.24 U28.20 U29.16 U30.14
VSS: BUS1.7 C50.2 C51.2 C53.2 U11.10 U22.7
VSYNC: FB6.2 U1.47
WDATA: P3.22 U12.53
WE: P3.24 U12.52
WP: P3.28 RR1.4 U12.1
pads on no net: BUS1.5 BUS1.8 BUS1.15 BUS1.16 BUS1.17 BUS1.18 BUS1.20 BUS1.28 J3.MH1 J3.MH2 P1.4 P1.9 P1.11 P1.15 P1.Un1 P1.Un2 P2. P3.4 P3.9 P3.17 P3.27 P3.33 P4.3 P4.4 P4.Un1 P4.Un2 P4.Un3 P5. P5.R7 RN4.3 RN4.4 RN4.5 RN4.6 RR2.9 SW2.8 SW2.8.1 U1.9 U1.10 U1.11 U1.12 U1.14 U1.15 U1.16 U1.17 U1.20 U1.21 U1.44 U1.63 U1.99 U1.100 U1.103 U1.104 U1.105 U1.106 U1.107 U1.108 U1.109 U1.110 U1.111 U1.112 U1.116 U1.117 U1.118 U1.119 U1.123 U1.127 U1.129 U1.132 U1.159 U2.5 U3.5 U4.5 U5.5 U7.13 U7.14 U7.15 U8.9 U8.10 U8.11 U8.12 U8.13 U8.14 U8.15 U9.1 U9.12 U9.19 U9.23 U9.26 U9.27 U9.32 U9.34 U9.35 U9.38 U10.1 U10.2 U10.3 U10.4 U10.5 U10.6 U10.9 U10.10 U10.11 U10.12 U10.13 U11.9 U12.29 U12.42 U12.43 U12.44 U12.47 U12.48 U12.63 U12.64 U12.66 U12.67 U14.26 U15.8 U15.9 U15.19 U15.22 U16.7 U16.11 U16.12 U16.15 U17.7 U17.9 U17.10 U17.11 U17.12 U17.13 U17.14 U23.1 U23.8 U24.48 U24.49 U24.53 U24.54 U24.55 U24.56 U24.60 U24.63 U24.87 U24.88 U24.90 U24.91 U24.92 U24.93 U24.94 U24.95 U24.97 U24.98 U24.99 U24.100 U25.7 U27.1 U27.22 U27.23 U29.4 U29.5 U29.7 U29.9 U29.11 U30.2 U30.4 U30.6 U30.8 X4.S1

## Silkscreen, mask and mechanical layers (free items; w line width, h text height)
Mechanical 1:
  lines w0.254: -0.005,2.475 -0.005,98.975 ; 0,0 0,2.46 ; 228.725,0.3 228.725,7.4 ; 228.725,0.4 ccw(c229.575,0.35) 229.525,-0.5 309.325,-0.5 ccw(c309.325,0.2) 310.025,0.2 310.025,7.4

## Text inside footprints (layer, text, board x,y; h text height)
J3: Top Overlay "8" at 203.301,102.3 h1.97 r90; Top Overlay "2" at 203.301,89.527 h1.97 r90; Top Overlay "7" at 208.255,102.3 h1.97 r90; Top Overlay "1" at 208.255,89.527 h1.97 r90; Mechanical 30 "4.953" at 205.27,86.044 h0.39 r90; Mechanical 30 "5.080" at 205.27,84.33 h0.39 r90; Mechanical 30 "2.476" at 209.651,88.394 h0.39 r90; Mechanical 30 "1.270" at 199.619,88.648 h0.39 r90; Mechanical 30 "2.540" at 198.603,89.854 h0.39 r90; Mechanical 30 "5.080" at 210.921,95.633 h0.39 r90; Mechanical 30 "7.620" at 197.65,95.633 h0.39 r90; Mechanical 30 "10.160" at 198.92,95.493 h0.39 r90; Mechanical 30 "3.683" at 202.793,101.475 h0.39 r90; Mechanical 30 "1.270" at 200.571,102.11 h0.39 r90; Mechanical 3 "1" at 208.255,89.527 h1.97 r90; Mechanical 3 "2" at 203.301,89.527 h1.97 r90; Mechanical 3 "7" at 208.255,102.3 h1.97 r90; Mechanical 3 "8" at 203.301,102.3 h1.97 r90
SW1: Mechanical 13 "ON" at 450.032,222.712 h1.27
SW2: Mechanical 13 "ON" at 247.742,222.712 h1.27
U1: Top Overlay "81" at 252.006,21.014 h1.02; Top Overlay "1" at 281.198,55.588 h1.02 r90; Top Overlay "41" at 248.984,51.722 h1.02; Top Overlay "121" at 281.242,23.884 h1.02